# EAGLE board kolektorius_v2-1 (EAGLE 6.3)
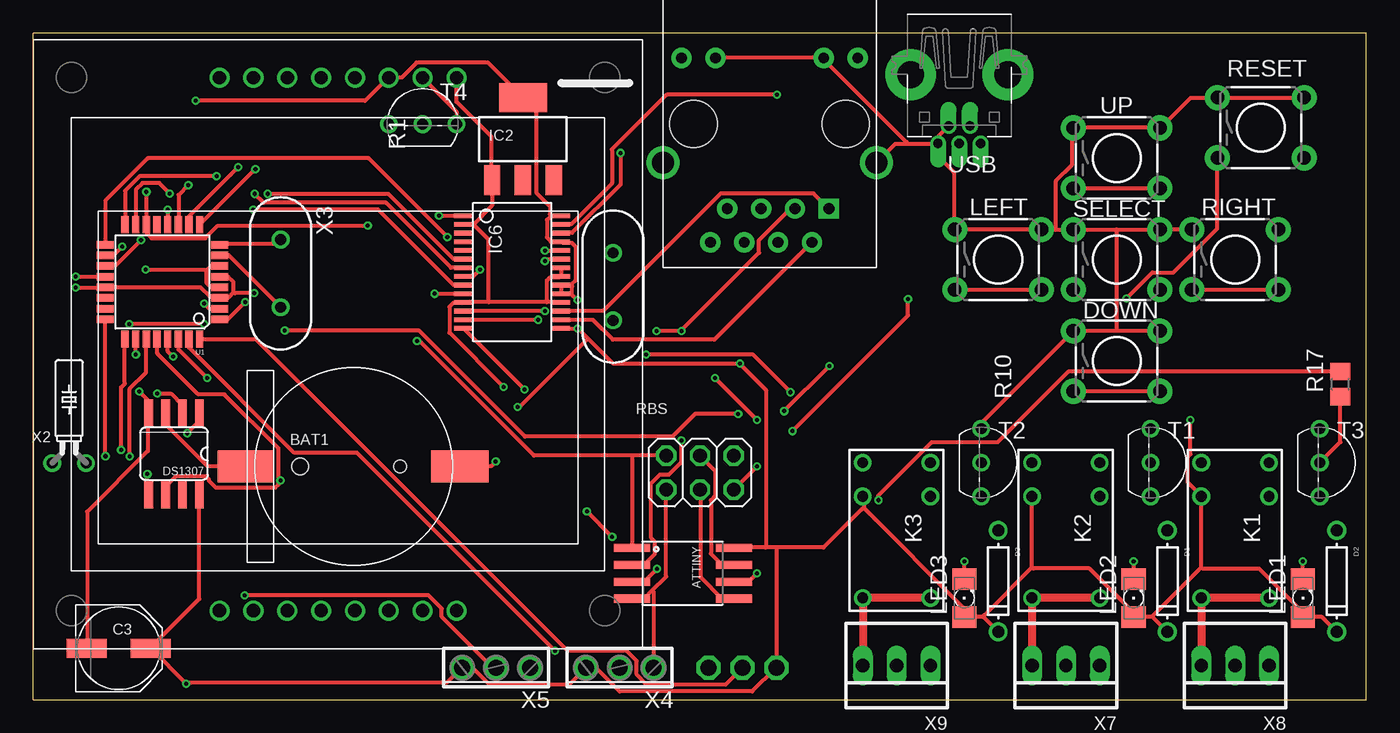
[diagram p0: board, top side]
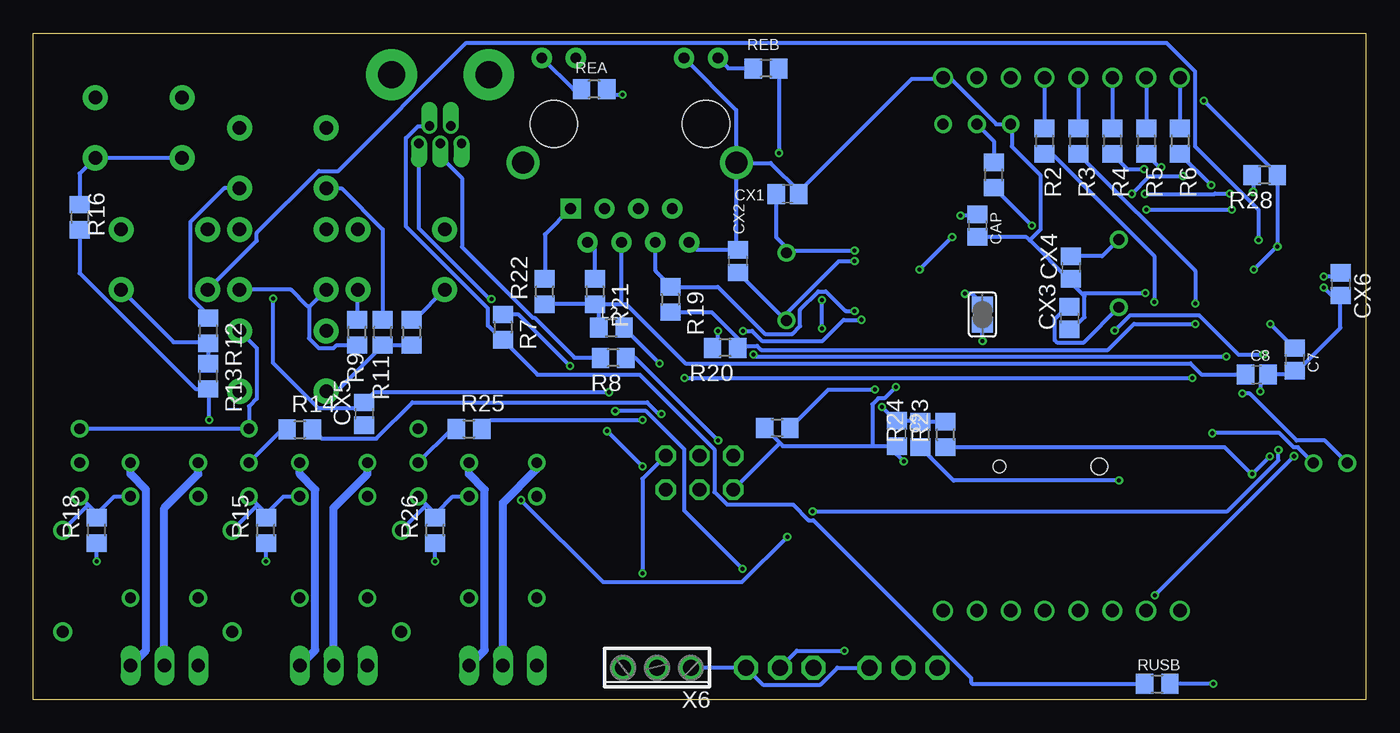
[diagram p1: board, bottom side, seen from below]

Size 100 x 50 mm. Coordinates in mm from the lower left corner, seen from the top.
Outline: 100,50 0,50 0,0 100,0 100,50
Copper layers (1*16): Top 0.035mm / dielectric 1.5mm / Bottom 0.035mm
Design rules "Fusion_eagle_rule_v1.1": minimum track width 6mil, minimum drill 12mil, track to track 6mil, track to pad 6mil, pad to pad 6mil, via to via 6mil, smd to smd 0mil, copper to edge 10mil, drill to drill 10mil, minimum pad ring 10mil, minimum via ring 6mil, stop-mask expansion 2mil, vias tented up to drill 100mil, thermal gap 10mil
Net classes: 0 default: width 0.305 mm, clearance 0.203 mm; 1 power: width 0.61 mm, clearance 0.203 mm
vRestrict: area 32,73 to 71,78

## Footprints (pad centres in the part's own frame; a part is rotated, then mirrored left to right if it is on the bottom)
SO8S2 = smd 0.61 x 2.7: 1 -1.905,-3.778; 2 -0.635,-3.778; 3 0.635,-3.778; 4 1.905,-3.778; 5 1.905,3.853; 6 0.635,3.853; 7 -0.635,3.853; 8 -1.905,3.853
BATTCON_12MM_SMT = smd 2.4 x 4.3: P$1 0,11.96 | smd 2.4 x 4.2: P$2 0,-4.1 | hole 0.95: 0,7.5 | hole 1.25: 0,0
PANASONIC_D = smd 3 x 1.4: + 2.4,0; - -2.4,0
C0805 = smd 1.3 x 1.5: 1 -0.85,0; 2 0.85,0
C0805' = smd 1.3 x 1.5: 1 -0.95,0; 2 0.95,0
DO-1N4148 = drill 0.9: A -3.81,0; C 3.81,0
TACTILE-PTH = drill 1.016 pad 1.88: 1 -3.251,2.261; 2 3.251,2.261; 3 -3.251,-2.261; 4 3.251,-2.261
SO08 = smd 0.66 x 2.032: 1 -1.905,-3.073; 2 -0.635,-3.073; 3 0.635,-3.073; 4 1.905,-3.073; 5 1.905,3.073; 6 0.635,3.073; 7 -0.635,3.073; 8 -1.905,3.073
SOT223 = smd 1.219 x 2.235: 1 -2.311,-3.099; 2 0,-3.099; 3 2.311,-3.099 | smd 3.6 x 2.2: 4 0,3.099
SSOP28DB = smd 0.348 x 1.397: 1 -4.225,-3.656; 2 -3.575,-3.656; 3 -2.925,-3.656; 4 -2.275,-3.656; 5 -1.625,-3.656; 6 -0.975,-3.656; 7 -0.325,-3.656; 8 0.325,-3.656; 9 0.975,-3.656; 10 1.625,-3.656; 11 2.275,-3.656; 12 2.925,-3.656; 13 3.575,-3.656; 14 4.225,-3.656; 15 4.225,3.656; 16 3.575,3.656; 17 2.925,3.656; 18 2.275,3.656; 19 1.625,3.656; 20 0.975,3.656; 21 0.325,3.656; 22 -0.325,3.656; 23 -0.975,3.656; 24 -1.625,3.656; 25 -2.275,3.656; 26 -2.925,3.656; 27 -3.575,3.656; 28 -4.225,3.656
2X03 = drill 1.016 octagon: 1 -2.54,-1.27; 2 -2.54,1.27; 3 0,-1.27; 4 0,1.27; 5 2.54,-1.27; 6 2.54,1.27
G5V1 = drill 0.813: 1 -5.08,-2.54; 2 -2.54,-2.54; 5 5.08,-2.54; 6 5.08,2.54; 9 -2.54,2.54; 10 -5.08,2.54
R0805 = smd 1.3 x 1.5: 1 -0.95,0; 2 0.95,0
1206 = smd 1.6 x 1.803: A -1.422,0; C 1.422,0
HR911105A = drill 0.813 pad 1.524: G+ 4.953,-6.604; G- 4.953,-4.064; GND -8.89,4.445; NC -6.35,3.175; P4 -8.89,-0.635; P5 -6.35,0.635; RD+ -6.35,-1.905; RD- -8.89,1.905; TD- -8.89,-3.175; Y+ 4.953,6.604; Y- 4.953,4.064 | drill 1.651 pad 2.159: SHIELD0 -2.921,8.001; SHIELD1 -2.921,-8.001 | drill 0.813 pad 1.524 square: TD+ -6.35,-4.445 | hole 3.556: 0,-5.715; 0,5.715
SJ = smd 1.168 x 1.6: 1 -0.762,0; 2 0.762,0
TO92-EBC-OVAL = drill 0.813: B 0,-1.27; C 2.54,-1.27; E -2.54,-1.27
TQFP32-08 = smd 1.27 x 0.559: 1 -4.293,2.8; 2 -4.293,2; 3 -4.293,1.2; 4 -4.293,0.4; 5 -4.293,-0.4; 6 -4.293,-1.2; 7 -4.293,-2; 8 -4.293,-2.8; 17 4.293,-2.8; 18 4.293,-2; 19 4.293,-1.2; 20 4.293,-0.4; 21 4.293,0.4; 22 4.293,1.2; 23 4.293,2; 24 4.293,2.8 | smd 0.559 x 1.27: 9 -2.8,-4.293; 10 -2,-4.293; 11 -1.2,-4.293; 12 -0.4,-4.293; 13 0.4,-4.293; 14 1.2,-4.293; 15 2,-4.293; 16 2.8,-4.293; 25 2.8,4.293; 26 2,4.293; 27 1.2,4.293; 28 0.4,4.293; 29 -0.4,4.293; 30 -1.2,4.293; 31 -2,4.293; 32 -2.8,4.293
CELLPHONE_NOKIA_5100_SPARKFUN = drill 1: P$1 -8.89,20; P$2 -6.35,20; P$3 -3.81,20; P$4 -1.27,20; P$5 1.27,20; P$6 3.81,20; P$7 6.35,20; P$8 8.89,20; P$9 -8.89,-20; P$10 -6.35,-20; P$11 -3.81,-20; P$12 -1.27,-20; P$13 1.27,-20; P$14 3.81,-20; P$15 6.35,-20; P$16 8.89,-20
USB-MINIB-THM-MOLEX = drill 0.7 offset: D+ 0,9.72; D- -0.8,8.42; GND 1.6,9.72; ID 0.8,8.42; VBUS -1.6,9.72 | drill 2 pad 3.81: GND1 -3.65,4.57; GND4 3.65,4.57
HC49US = drill 0.813: 1 -2.54,0; 2 2.54,0
TC26H = drill 0.813: 1 -1.27,0; 2 1.27,0
3POL254 = drill 1.2 octagon: 1 -2.54,0; 2 0,0; 3 2.54,0
22-23-2031 = drill 1 long: 1 -2.54,0; 2 0,0; 3 2.54,0

## Placement (x,y rotation side)
ATTINY  ATTINY45SO8S2  [SO8S2]  48.7,9.48 270 top
BAT1  [BATTCON_12MM_SMT]  20.03,17.48 270 top
C3  100u  [PANASONIC_D]  6.42,3.85 0 top
C7  0.1µ  [C0805]  5.36,25.53 90 bottom
C8  0.1µ  [C0805]  8.21,24.39 180 bottom
C9  0.1u  [C0805']  35.22,19.97 270 bottom
CAP  10u  [C0805]  29.16,35.57 270 bottom
CX1  18p  [C0805]  43.42,37.94 0 bottom
CX2  18p  [C0805]  47.13,32.9 90 bottom
CX3  22p  [C0805]  22.26,28.63 90 bottom
CX4  22p  [C0805]  22.14,32.42 90 bottom
CX5  100n  [C0805]  75.16,21.45 90 bottom
CX6  100n  [C0805]  1.91,31.17 270 bottom
D1  [DO-1N4148]  85.09,8.89 270 top
D2  [DO-1N4148]  97.79,8.89 270 top
D3  [DO-1N4148]  72.39,8.89 270 top
DOWN  [TACTILE-PTH]  81.28,25.4 0 top
DS1307  DS1307  [SO08]  10.56,18.45 180 top
IC2  LM1117-33  [SOT223]  36.73,42.07 0 top
IC6  ENC28J60  [SSOP28DB]  35.93,32.08 270 top
ISP  [2X03]  50.02,17.02 180 top
K1  G5V1  [G5V1]  90.17,12.7 270 top
K2  G5V1  [G5V1]  77.47,12.7 270 top
K3  G5V1  [G5V1]  64.77,12.7 270 top
L2  Bead  [R0805]  56.63,27.91 0 bottom
LED1  [1206]  95.25,7.62 90 top
LED2  [1206]  82.55,7.62 90 top
LED3  [1206]  69.85,7.62 90 top
LEFT  [TACTILE-PTH]  72.39,33.02 0 top
R1  10k  [R0805]  27.94,39.37 90 bottom
R2  10k  [R0805]  24.13,41.91 270 bottom
R3  10k  [R0805]  21.59,41.91 270 bottom
R4  10k  [R0805]  19.05,41.91 270 bottom
R5  10k  [R0805]  16.51,41.91 270 bottom
R6  10k  [R0805]  13.97,41.91 270 bottom
R7  47  [R0805]  64.77,27.94 270 bottom
R8  47  [R0805]  56.49,25.65 180 bottom
R9  3k3  [R0805]  75.69,27.56 90 bottom
R10  1k  [R0805]  71.63,27.56 270 bottom
R11  620  [R0805]  73.79,27.56 90 bottom
R12  330  [R0805]  86.87,27.69 270 bottom
R13  2k  [R0805]  86.87,24.26 270 bottom
R14  3k3  [R0805]  80.01,20.27 0 bottom
R15  470  [R0805]  82.55,12.7 90 bottom
R16  10k  [R0805]  96.52,36.2 270 bottom
R17  3k3  [R0805]  98.07,23.67 90 top
R18  470  [R0805]  95.25,12.7 90 bottom
R19  49  [R0805]  52.21,30.03 270 bottom
R20  49  [R0805]  48.09,26.4 180 bottom
R21  49  [R0805]  57.87,30.62 270 bottom
R22  49  [R0805]  61.63,30.62 90 bottom
R23  10k  [R0805]  31.56,19.89 90 bottom
R24  10k  [R0805]  33.43,19.89 90 bottom
R25  3k3  [R0805]  67.31,20.32 0 bottom
R26  470  [R0805]  69.85,12.7 90 bottom
R28  3k3  [R0805]  7.62,39.37 180 bottom
RBS  2.32K  [R0805]  44.18,20.4 0 bottom
REA  330  [R0805]  57.92,45.8 180 bottom
REB  330  [R0805]  45.03,47.36 180 bottom
RESET  [TACTILE-PTH]  92.09,42.91 0 top
RIGHT  [TACTILE-PTH]  90.17,33.02 0 top
RJ45  HR911105A  [HR911105A]  55.24,43.2 90 top
RUSB  1.5k  [R0805]  15.68,1.17 0 bottom
SELECT  [TACTILE-PTH]  81.28,33.02 0 top
SJ1  [SJ]  28.79,28.89 90 bottom
T1  2N2222  [TO92-EBC-OVAL]  85.09,17.78 270 top
T2  2N2222  [TO92-EBC-OVAL]  72.39,17.78 270 top
T3  2N2222  [TO92-EBC-OVAL]  97.79,17.78 270 top
T4  2N2222  [TO92-EBC-OVAL]  29.21,44.45 0 top
U1  ATMEGA328P  [TQFP32-08]  9.68,31.34 180 top
U$2  CELLPHONE_NOKIA_5100  [CELLPHONE_NOKIA_5100_SPARKFUN]  22.86,26.67 0 top
UP  [TACTILE-PTH]  81.28,40.64 0 top
USB  [USB-MINIB-THM-MOLEX]  69.47,51.46 180 top
X1  25MHz  [HC49US]  43.49,30.99 90 top
X2  32.768kHz  [TC26H]  2.69,17.75 0 top
X3  25MHz  [HC49US]  18.56,31.98 270 top
X4  [3POL254]  43.99,2.39 180 top
X5  [3POL254]  34.72,2.39 180 top
X6  [3POL254]  53.21,2.39 180 bottom
X7  22-23-2031  [22-23-2031]  77.47,2.54 180 top
X8  22-23-2031  [22-23-2031]  90.17,2.54 180 top
X9  22-23-2031  [22-23-2031]  64.77,2.54 180 top

## Library data of the parts
ATTINY IC2 X1 X3 = SparkFun
BAT1 = SparkFunNew
C3 C7 C8 CAP CX1-CX6 = resistor
C9 L2 R1-R26 R28 RBS REA REB RUSB = rcl
D1-D3 DS1307 LED1-LED3 T1-T4 USB = adafruit
DOWN LEFT RESET RIGHT SELECT UP = SparkFun-Electromechanical
IC6 = SparkFun-DigitalIC
ISP = pinhead
K1-K3 = relay; MPN: G5V-1-DC24; OC_FARNELL: 9949593; OC_NEWARK: 36M6377
RJ45 = CONNECTER
SJ1 = jumper
U1 = SparkFun-DigitalIC; PROD_ID: IC-09069
U$2 = DIY-Cellphone
X2 = crystal; OC_FARNELL: unknown; OC_NEWARK: unknown
X4-X6 = con-phoenix-254; OC_FARNELL: unknown; OC_NEWARK: unknown
X7-X9 = con-molex; MF: MOLEX; MPN: 22-23-2031; OC_FARNELL: 1462950; OC_NEWARK: 30C0862

## Nets
A0: U1.23
A1: U1.24 X5.2
A2: R17.2 U1.25
A3: R14.2 U1.26
A6: R12.2 R13.1 RIGHT.3 RIGHT.4 U1.19
A7: U1.22
D0: R25.2 U1.30
D1: U1.31 X4.2
D2: U1.32 X6.2
D3: R2.2 U1.1
D4: R3.2 U1.2
D5: R4.2 U1.9
D6: R5.2 U1.10
D7: R6.2 U1.11
D8: IC6.9 U1.12
D9: U1.13
D10: R1.1 R28.2 U1.14
D11: IC6.7 U1.15
D12: IC6.6 U1.16
D13: IC6.8 U1.17
D+: ATTINY.2 R8.1
D-: ATTINY.3 R7.1
DTR: CX5.1
GND: ATTINY.4 BAT1.P$1 C3.- C7.1 C8.1 C9.2 CAP.2 CX1.2 CX2.2 CX3.1 CX4.1 CX6.2 DOWN.1 DOWN.2 DS1307.4 IC2.1 IC6.2 IC6.11 IC6.18 IC6.21 IC6.22 ISP.6 LEFT.1 LEFT.2 RBS.1 RESET.1 RESET.2 RIGHT.1 RJ45.G- RJ45.GND RJ45.SHIELD0 RJ45.SHIELD1 RJ45.Y- SELECT.1 SELECT.2 T1.E T2.E T3.E T4.E U1.3 U1.5 U1.21 U$2.P$8 UP.1 UP.2 USB.GND USB.ID X4.1 X5.1 X6.1
LEDA: REA.2 RJ45.G+
LEDB: REB.2 RJ45.Y+
MISO: ATTINY.6 ISP.1
MOSI: ATTINY.5 ISP.4
N$1: LEFT.3 LEFT.4 R9.2 R10.1
N$2: D1.A K2.9 R15.2 T1.C
N$3: R14.1 T1.B
N$4 [power]: K2.5 K2.6 X7.3
N$5 [power]: K2.1 X7.2
N$6: DOWN.3 DOWN.4 R10.2 R11.1
N$7: LED2.C R15.1
N$8: DS1307.1 X2.2
N$9: R11.2 R12.1 UP.3 UP.4
N$11: D3.A K3.9 R26.2 T2.C
N$12: D2.A K1.9 R18.2 T3.C
N$13: R17.1 T3.B
N$14 [power]: K2.10 X7.1
N$15 [power]: K3.10 X9.1
N$16 [power]: K1.10 X8.1
N$17: R25.1 T2.B
N$18: R9.1 SELECT.3 SELECT.4
N$19 [power]: K1.5 K1.6 X8.3
N$20 [power]: K1.1 X8.2
N$21: LED1.C R18.1
N$22: R2.1 U$2.P$5
N$23: R5.1 U$2.P$2
N$24: R4.1 U$2.P$3
N$25: R3.1 U$2.P$4
N$26: T4.C U$2.P$7
N$28 [power]: K3.5 K3.6 X9.3
N$29 [power]: K3.1 X9.2
N$30: DS1307.2 X2.1
N$31: LED3.C R26.1
N$32: CX4.2 U1.8 X3.1
N$33: CX3.2 U1.7 X3.2
N$34: IC6.27 REA.1
N$35: CX6.1 U1.20
N$36: BAT1.P$2 DS1307.3
N$37: IC6.26 REB.1
N$38: R8.2 USB.D+
N$39: CAP.1 IC6.1
N$41: CX1.1 IC6.24 X1.2
N$42: CX2.1 IC6.23 X1.1
N$44: R1.2 T4.B
N$45: R7.2 RUSB.1 USB.D-
N$46: CX5.2 R16.1 RESET.3 RESET.4 U1.29
N$52: ATTINY.1 ISP.5 SJ1.1
N$54: C7.2 R19.2 R20.1
N$59: IC6.14 RBS.2
RD+: IC6.13 R20.2 RJ45.RD+
RD-: IC6.12 R19.1 RJ45.RD-
RESET: IC6.10 SJ1.2
SCK: ATTINY.7 ISP.3
SCL: DS1307.6 R24.1 U1.28
SDA: DS1307.5 R23.1 U1.27
TCT: C8.2 L2.1 R21.2 R22.1 RJ45.P4
TD+: IC6.17 R22.2 RJ45.TD+
TD-: IC6.16 R21.1 RJ45.TD-
V$: R6.1 U$2.P$1
VCC: ATTINY.8 C3.+ C9.1 D1.C D2.C D3.C DS1307.8 IC2.4 IC6.15 IC6.19 IC6.20 IC6.25 IC6.28 K1.2 K2.2 K3.2 L2.2 LED1.A LED2.A LED3.A R13.2 R16.2 R23.2 R24.2 R28.1 RUSB.2 U1.4 U1.6 U1.18 U$2.P$6 X4.3 X5.3 X6.3
VIN: ISP.2 USB.VBUS

## Tracks (layer width: path | path; a pad name or v marks a point on that pad's centre or on a via)
A1  (via drill 0.3)
  Top 0.305: v5.41,18.26 5.41,28.52 U1.24 | v15.85,7.82 29.64,7.82 30.63,6.83 30.63,6.2 34.44,2.39 X5.2
  Bottom 0.305: v15.85,7.82 v5.41,18.26
A2  (via drill 0.3)
  Top 0.305: v6.58,18.75 6.58,23.42 6.86,23.7 6.86,27.03 U1.25 | v43.43,12.22 v41.53,14.12 | v63.4,14.96 63.4,15.32 67.39,19.3 72.34,19.3 77.65,24.61 R17.2
  Bottom 0.305: v6.58,18.75 6.58,17.96 10.41,14.12 v41.53,14.12 | v43.43,12.22 46.84,8.81 57.25,8.81 v63.4,14.96
A3  (via drill 0.3)
  Top 0.305: v7.7,25.88 7.7,27.03 U1.26 | v18.87,27.69 28.93,27.69 36.88,19.74 47.95,19.74 49.66,21.44 v52.88,21.44
  Bottom 0.305: v7.7,25.88 9.58,25.88 12.55,28.85 17.7,28.85 v18.87,27.69 | v52.88,21.44 53.09,21.44 53.95,22.3 71.55,22.3 74.27,19.58 78.36,19.58 79.05,20.27 R14.2
A6  (via drill 0.3)
  Top 0.305: v8.08,34.47 6.17,32.56 5.41,32.56 U1.19 | RIGHT.3 RIGHT.4
  Bottom 0.305: R13.1 R12.2 87,26.82 89.48,26.82 RIGHT.4 | v8.08,34.47 8.08,36.75 12.85,41.53 12.85,47.14 14.99,49.28 67.51,49.28 77.11,39.67 78.59,39.67 83.24,35.03 83.24,34.44 RIGHT.3
D0  (via drill 0.3)
  Top 0.305: v13.03,24.13 10.9,26.26 10.9,27.03 U1.30 | v54.3,20.98 v51.16,24.13
  Bottom 0.305: v51.16,24.13 v13.03,24.13 | v54.3,20.98 65.68,20.98 66.34,20.32 R25.2
D1  (via drill 0.3)
  Top 0.305: v39.14,3.66 24.28,18.52 19.58,18.52 11.68,26.42 11.68,27.03 U1.31
  Bottom 0.305: v39.14,3.66 42.72,3.66 X4.2
D2
  Top 0.305: X6.2 51.94,1.12 46.02,1.12 45.26,1.88 45.26,2.9 44.5,3.66 40.08,3.66 16.71,27.03 12.5,27.03 U1.32
D3  (via drill 0.3)
  Top 0.305: v15.9,29.84 14.61,28.55 13.99,28.55 U1.1
  Bottom 0.305: v15.9,29.84 15.9,33.3 23.55,40.95 24.13,40.95 R2.2
D4  (via drill 0.3)
  Top 0.305: v12.83,29.72 13.18,29.36 13.97,29.36 U1.2
  Bottom 0.305: v12.83,29.72 12.83,32.18 21.59,40.95 R3.2
D5  (via drill 0.3)
  Top 0.305: v16.66,39.8 12.5,35.64 U1.9
  Bottom 0.305: v16.66,39.8 17.91,39.8 19.05,40.95 R4.2
D6  (via drill 0.3)
  Top 0.305: v15.37,39.95 11.68,36.27 U1.10
  Bottom 0.305: v15.37,39.95 15.52,39.95 16.51,40.95 R5.2
D7  (via drill 0.3)
  Top 0.305: v11.63,38.61 10.9,37.87 10.9,35.64 U1.11
  Bottom 0.305: v11.63,38.61 13.97,40.95 R6.2
D8  (via drill 0.3)
  Top 0.305: v10.08,36.78 U1.12 | v16.48,36.78 25.86,36.78 31.52,31.11 32.26,31.11 IC6.9
  Bottom 0.305: v16.48,36.78 v10.08,36.78
D10  (via drill 0.3)
  Top 0.305: v8.48,38.1 U1.14 8.53,35.48 8.53,34.95 8.87,34.62 12.9,34.62 13.84,35.56 v25.09,35.56
  Bottom 0.305: v8.48,38.1 8.48,39.29 R28.2 | v25.09,35.56 27.94,38.41 R1.1
D11  (via drill 0.3)
  Top 0.305: v10.24,37.97 9.45,38.76 8.2,38.76 7.7,38.25 7.7,35.64 U1.15 | v16.61,37.95 17.27,37.29 26.47,37.29 31.34,32.41 32.26,32.41 IC6.7
  Bottom 0.305: v10.24,37.97 11.33,37.97 11.35,37.95 v16.61,37.95
D12  (via drill 0.3)
  Top 0.305: v13.74,39.27 7.98,39.27 6.88,38.18 U1.16 | v17.58,37.95 26.64,37.95 31.52,33.07 32.26,33.07 IC6.6
  Bottom 0.305: v13.74,39.27 16.26,39.27 v17.58,37.95
D13  (via drill 0.3)
  Top 0.305: v31.06,34.7 25.15,40.62 8.59,40.62 5.41,37.44 5.41,34.16 U1.17 | v33.5,32.26 33.02,31.77 32.28,31.77 IC6.8
  Bottom 0.305: v33.5,32.26 v31.06,34.7
D+  (via drill 0.3)
  Top 0.305: v48.62,19.43 48.62,17.83 47.68,16.89 47.02,16.89 46.35,16.23 46.35,12.12 46.63,11.84 46.63,10.92 45.85,10.13 44.93,10.13 ATTINY.2
  Bottom 0.305: v48.62,19.43 54.81,25.63 55.52,25.63 R8.1
D-  (via drill 0.3)
  Top 0.305: v56.34,21.64 v59.74,25.04 | v46.79,9.8 45.85,8.87 44.93,8.87 ATTINY.3
  Bottom 0.305: v59.74,25.04 63.58,28.88 R7.1 | v56.34,21.64 54.03,21.64 51.16,18.77 51.16,14.17 v46.79,9.8
GND  (via drill 0.3)
  Top 0.305: RESET.2 95.33,45.19 88.98,45.19 RESET.1 88.82,45.16 86.84,45.16 84.66,42.98 UP.2 UP.1 77.95,42.77 77.95,40.16 76.73,38.94 76.73,35.28 | RIGHT.1 SELECT.2 81.28,35.28 | 76.73,35.28 LEFT.2 LEFT.1 69.06,35.41 69.06,39.57 67.94,40.69 67.94,41.6 USB.GND | 76.73,35.28 SELECT.1 81.28,35.28 | T2.E 71.12,20.75 DOWN.1 81.28,27.66 | DOWN.2 81.28,27.66 | 81.28,27.66 81.28,35.28 | 14.99,30.53 14.61,30.15 13.99,30.15 U1.3 13.84,30.23 13.26,30.23 12.55,30.94 5.41,30.94 U1.21 5.23,30.91 v3.17,30.91 | 14.99,30.53 14.99,31.37 14.63,31.73 13.99,31.73 U1.5 | v7.95,23.11 8.64,22.43 8.64,21.54 DS1307.4 8.59,21.39 8.59,18.64 4.04,14.1 4.04,3.86 C3.- | v34.7,17.86 34.34,17.5 32,17.5 BAT1.P$1 | 46.43,8.18 45.92,7.67 45.06,7.67 ATTINY.4 | 46.43,8.18 47.47,9.22 ISP.6 | 33.02,35.66 32.28,35.66 IC6.2 | 33.02,35.66 34.42,37.06 IC2.1 34.37,39.12 34.37,42.24 31.75,44.86 U$2.P$8 | IC6.22 39.6,32.38 39.6,31.77 IC6.21 39.45,31.7 38.79,31.7 38.53,31.45 38.53,29.82 | 38.53,29.82 39.57,29.82 IC6.18 | 38.53,29.82 34.16,29.82 | 34.16,29.82 32.28,29.82 IC6.11 32.13,29.77 31.5,29.77 31.22,29.49 31.22,27.53 v35.28,23.47 | 33.02,35.66 34.16,34.52 34.16,29.82 | RJ45.Y- 59.28,48.16 RJ45.G- 59.33,48.01 65.51,41.83 65.51,41.71 | USB.GND 67.89,41.76 67.89,42.27 68.66,43.03 USB.ID | 65.51,41.71 64.67,41.71 RJ45.SHIELD1 | 65.51,41.71 67.72,41.71 USB.GND | v16.56,30.5 15.11,30.5 14.99,30.53 | X4.1 46.53,8.08 46.43,8.18
  Bottom 0.305: DOWN.2 83.24,26.36 83.24,22.58 83.82,22 T1.E T3.E | v7.95,23.11 7.95,23.75 7.44,24.26 C8.1 7.34,24.41 5.64,24.41 5.38,24.66 C7.1 5.23,24.59 1.93,27.89 1.93,30.3 CX6.2 2.06,29.79 v3.17,30.91 | 37.06,19.02 43.76,19.02 43.99,19.25 | 37.06,19.02 C9.2 35.74,18.9 v34.7,17.86 | 43.99,19.25 RBS.1 | 43.99,19.25 47.47,15.77 ISP.6 | 21.26,30.4 21.13,30.28 21.13,28.7 22.05,27.79 CX3.1 | 21.26,30.4 22.12,31.27 22.12,31.55 CX4.1 22.25,31.47 25.25,34.47 | 25.25,34.47 25.48,34.7 29.16,34.7 CAP.2 | 25.25,34.47 24.43,35.28 24.43,39.34 26.59,41.5 26.59,43.05 T4.E 27.76,43.18 31.24,46.66 U$2.P$8 31.88,46.58 34.09,46.58 42.44,38.23 CX1.2 42.57,38.15 44.68,40.26 47.22,40.26 RJ45.SHIELD0 | RJ45.GND 50.77,34.29 50.24,33.76 47.14,33.76 CX2.2 47.27,33.88 47.27,40.11 RJ45.SHIELD0 | RJ45.SHIELD0 47.27,40.44 47.27,44.25 51.16,48.13 RJ45.Y- | 37.06,19.02 37.06,22.15 36.6,22.61 36.14,22.61 v35.28,23.47 | v16.56,30.5 21.16,30.5 21.26,30.4 | X5.1 39.67,2.39 40.95,1.12 45.26,1.12 X4.1 X6.1
LEDA
  Bottom 0.305: REA.2 59.49,45.8 61.82,48.13 RJ45.G+
LEDB
  Bottom 0.305: REB.2 46,47.37 47.85,47.37 48.62,48.13 RJ45.Y+
MISO  (via drill 0.3)
  Top 0.305: v54.3,9.47 53.7,8.87 52.58,8.87 ATTINY.6
  Bottom 0.305: v54.3,9.47 54.3,16.56 52.58,18.29 ISP.1
MOSI
  Top 0.305: ATTINY.5 52.55,7.59 51.64,7.59 50.04,9.2 50.04,15.75 ISP.4
N$1
  Top 0.305: LEFT.3 LEFT.4
  Bottom 0.305: R9.2 75.69,30.71 LEFT.4 | LEFT.3 71.37,28.52 71.63,28.52 R10.1
N$2
  Bottom 0.305: T1.C 83.19,14.61 | 83.19,14.61 82.55,13.97 R15.2 82.42,14.05 81.23,15.24 K2.9 | 83.19,14.61 D1.A
N$3
  Bottom 0.305: R14.1 81.33,20.27 T1.B
N$4
  Top 0.61: K2.6 K2.5 X7.3
N$5
  Bottom 0.61: K2.1 74.93,16.92 77.47,14.38 X7.2
N$6
  Top 0.305: DOWN.3 DOWN.4
  Bottom 0.305: R10.2 R11.1 73.86,26.49 77.22,23.14 DOWN.3
N$7  (via drill 0.3)
  Top 0.305: LED2.C v82.55,10.36
  Bottom 0.305: v82.55,10.36 R15.1
N$8  (via drill 0.3)
  Top 0.305: v11.53,19.99 12.45,20.9 12.45,21.51 DS1307.1
  Bottom 0.305: v11.53,19.99 6.5,19.99 5.44,18.92 5.13,18.92 X2.2
N$9
  Top 0.305: UP.3 UP.4
  Bottom 0.305: R12.1 86.87,28.85 88.21,30.2 88.21,35.84 85.67,38.38 UP.4 | R11.2 73.79,35.28 76.89,38.38 UP.3
N$11
  Bottom 0.305: T2.C 70.48,14.61 | 70.48,14.61 69.85,13.97 R26.2 69.72,14.05 68.53,15.24 K3.9 | 70.48,14.61 D3.A
N$12
  Bottom 0.305: T3.C 95.89,14.61 | 95.89,14.61 95.25,13.97 R18.2 95.12,14.05 93.93,15.24 K1.9 | 95.89,14.61 D2.A
N$13
  Top 0.305: R17.1 98.07,19.33 T3.B
N$14
  Bottom 0.61: K2.10 80.01,16.92 78.84,15.75 78.84,3.71 X7.1
N$15
  Bottom 0.61: K3.10 67.31,16.92 66.14,15.75 66.14,3.71 X9.1
N$16
  Bottom 0.61: K1.10 92.71,16.92 91.54,15.75 91.54,3.71 X8.1
N$17
  Bottom 0.305: R25.1 68.58,20.32 T2.B
N$18
  Bottom 0.305: 79.32,29.46 79.32,27.1 78.59,26.36 77.47,26.36 77.24,26.59 75.69,26.59 R9.1 | SELECT.3 79.32,29.46 | SELECT.4 80.67,30.76 79.45,29.54 79.32,29.46
N$19
  Top 0.61: K1.6 K1.5 X8.3
N$20
  Bottom 0.61: K1.1 87.63,16.92 90.17,14.38 X8.2
N$21  (via drill 0.3)
  Top 0.305: LED1.C v95.25,10.36
  Bottom 0.305: v95.25,10.36 R18.1
N$22
  Bottom 0.305: U$2.P$5 R2.1
N$23
  Bottom 0.305: U$2.P$2 R5.1
N$24
  Bottom 0.305: U$2.P$3 R4.1
N$25
  Bottom 0.305: U$2.P$4 R3.1
N$26
  Top 0.305: T4.C 31.75,44.12 U$2.P$7
N$28
  Top 0.61: K3.6 K3.5 X9.3
N$29
  Bottom 0.61: K3.1 62.23,17.3 64.77,14.76 X9.2
N$30  (via drill 0.3)
  Top 0.305: v9.3,22.96 10.34,22.96 11.18,22.12 11.18,21.54 DS1307.2
  Bottom 0.305: v9.3,22.96 8.74,22.96 5.21,19.43 3.1,19.43 X2.1
N$31  (via drill 0.3)
  Top 0.305: LED3.C v69.85,10.36
  Bottom 0.305: v69.85,10.36 R26.1
N$32
  Top 0.305: U1.8 13.99,34.16 18.19,34.16 18.54,34.52 X3.1
  Bottom 0.305: CX4.2 22.12,33.27 19.81,33.27 X3.1
N$33
  Top 0.305: U1.7 13.99,33.33 14.68,33.33 18.54,29.46 X3.2
  Bottom 0.305: CX3.2 22.28,29.46 22.48,29.46 23.37,28.57 23.37,26.98 23.16,26.77 21.23,26.77 X3.2
N$34  (via drill 0.3)
  Top 0.305: v55.8,45.39 47.5,45.39 43.41,41.3 43.41,38.73 40.34,35.66 IC6.27
  Bottom 0.305: v55.8,45.39 56.57,45.39 56.95,45.77 REA.1
N$35  (via drill 0.3)
  Top 0.305: v3.17,31.75 U1.20
  Bottom 0.305: v3.17,31.75 2.18,31.75 1.93,32 CX6.1
N$36
  Top 0.305: DS1307.3 9.93,20.65 13.08,17.5 15.93,17.5 BAT1.P$2
N$37  (via drill 0.3)
  Top 0.305: v44.07,41.02 44.07,38.66 40.44,35.03 39.6,35.03 IC6.26
  Bottom 0.305: v44.07,41.02 44.07,47.35 REB.1
N$38
  Bottom 0.305: R8.2 57.45,25.65 59.41,25.65 62.41,28.65 62.53,28.65 67.84,33.96 67.84,39.14 69.47,40.77 USB.D+
N$39  (via drill 0.3)
  Top 0.305: v30.43,36.32 32.26,36.32 IC6.1
  Bottom 0.305: v30.43,36.32 29.26,36.32 29.18,36.4 CAP.1
N$41  (via drill 0.3)
  Top 0.305: v38.38,33.71 39.57,33.71 IC6.24
  Bottom 0.305: v38.38,33.71 43.33,33.71 43.48,33.55 X1.2 43.41,33.83 44.25,34.67 44.25,37.92 CX1.1
N$42  (via drill 0.3)
  Top 0.305: v38.38,32.89 38.53,33.05 39.57,33.05 IC6.23
  Bottom 0.305: v38.38,32.89 39.57,32.89 43.48,28.98 43.48,28.47 X1.1 43.61,28.52 47.12,32.03 CX2.1
N$44
  Bottom 0.305: R1.2 27.94,41.91 T4.B
N$45
  Bottom 0.305: RUSB.1 16.64,1.19 29.57,1.19 29.64,1.32 29.64,1.63 41.48,13.46 41.83,13.46 43,14.63 47.95,14.63 48.9,15.57 48.9,18.77 54.51,24.38 62.18,24.38 64.77,26.98 R7.2 64.9,27.08 65.89,28.07 65.89,29.36 72.03,35.51 72.03,42.14 71.14,43.03 70.28,43.03 USB.D-
N$46  (via drill 0.3)
  Top 0.305: v10.49,25.73 10.08,26.14 10.08,27.03 U1.29 | v45.97,25.88 54,25.88 v56.82,23.06 | v82.02,30.1 83.97,32.05 85.55,32.05 88.82,35.33 88.82,40.64 RESET.3
  Bottom 0.305: R16.1 96.52,39.47 95.35,40.64 RESET.4 95.2,40.66 88.85,40.66 RESET.3 | v10.49,25.73 45.82,25.73 v45.97,25.88 | v56.82,23.06 74.4,23.06 CX5.2 75.31,22.25 75.72,21.84 78.59,21.84 82.02,25.27 v82.02,30.1
N$52  (via drill 0.3)
  Top 0.305: v28.78,26.9 28.98,26.9 37.57,18.31 44.93,18.31 | 44.93,18.31 47.47,18.31 ISP.5 | 44.93,18.31 44.93,11.4 ATTINY.1
  Bottom 0.305: v28.78,26.9 28.78,28.12 SJ1.1
N$54  (via drill 0.3)
  Top 0.305: v12.83,28.19 v7.19,28.19
  Bottom 0.305: v7.19,28.19 5.38,26.39 C7.2 | v12.83,28.19 17.42,28.19 19.38,26.24 45.39,26.24 45.7,26.54 46.99,26.54 47.12,26.42 R20.1 46.71,26.67 49.1,29.06 52.2,29.06 R19.2
N$59  (via drill 0.3)
  Top 0.305: v36.85,23.27 32.28,27.84 IC6.14
  Bottom 0.305: v36.85,23.27 40.36,23.27 43.2,20.42 RBS.2
RD+  (via drill 0.3)
  Top 0.305: v37.87,28.5 32.28,28.5 IC6.13 | v46.76,27.66 v48.64,27.66 48.72,27.79 54.46,33.53 54.46,34.49 56.79,36.83 57.12,36.83 RJ45.RD+
  Bottom 0.305: v37.87,28.5 39.22,28.5 40.79,26.92 45.34,26.92 46.08,27.66 v46.76,27.66 | v48.64,27.66 48.64,26.8 49.02,26.42 R20.2
RD-  (via drill 0.3)
  Top 0.305: v38.38,29.16 32.28,29.16 IC6.12
  Bottom 0.305: v38.38,29.16 39.06,29.16 40.54,30.63 41.1,30.63 42.47,29.26 42.47,28.02 43.05,27.43 45.11,27.43 48.64,30.96 52.2,30.96 R19.1 52.27,31.11 53.31,32.16 53.31,34.29 RJ45.RD-
RESET  (via drill 0.3)
  Top 0.305: v30.1,30.45 32.26,30.45 IC6.10
  Bottom 0.305: v30.1,30.45 29.59,30.45 28.8,29.67 SJ1.2
SCK
  Top 0.305: ATTINY.7 52.55,10.13 51.64,10.13 50.83,10.95 50.83,14.96 51.16,15.29 51.16,17.17 50.04,18.29 ISP.3
SCL  (via drill 0.3)
  Top 0.305: 18.39,16.43 18.39,16.13 18.16,15.9 13.69,15.9 13.16,16.43 13.16,16.54 12.93,16.76 10.72,16.76 9.93,15.98 9.93,15.39 DS1307.6 | 18.39,16.43 18.39,18.85 14.33,22.91 12.37,22.91 9.3,25.98 9.3,27.03 U1.28 | v18.54,16.43 18.39,16.43
  Bottom 0.305: v18.54,16.43 30.96,16.43 32.69,18.16 32.69,18.19 33.43,18.92 R24.1
SDA  (via drill 0.3)
  Top 0.305: v7.24,18.24 7.24,23.34 8.46,24.56 8.46,27.03 U1.27 | v8.56,16.92 8.56,15.47 8.64,15.39 DS1307.5
  Bottom 0.305: v7.24,18.24 v8.56,16.92 8.69,16.99 10.62,18.92 31.55,18.92 R23.1
TCT
  Bottom 0.305: 55.88,29.67 R21.2 | 55.88,29.67 55.52,29.67 51.08,25.22 13.18,25.22 12.37,24.41 9.07,24.41 C8.2 | L2.1 57.58,29.54 R21.2 | R22.1 58.01,29.67 R21.2 | 55.88,29.67 55.88,34.29 RJ45.P4
TD+
  Top 0.305: IC6.17 42.75,29.16 51.56,37.97 58.55,37.97 59.66,36.85 RJ45.TD+
  Bottom 0.305: R22.2 61.62,34.9 59.69,36.83 RJ45.TD+
TD-
  Top 0.305: IC6.16 41.99,28.5 43.48,27 51.1,27 58.4,34.29 RJ45.TD-
  Bottom 0.305: R21.1 57.89,31.57 57.89,33.78 58.4,34.29 RJ45.TD-
V$
  Bottom 0.305: U$2.P$1 R6.1
VCC  (via drill 0.3)
  Top 0.305: 71.27,6.2 LED3.A | D3.C 71.27,6.2 | LED3.A | 74.93,9.91 K2.2 | 74.93,9.91 71.35,6.33 71.27,6.2 | LED1.A 96.67,6.2 D2.C | LED1.A | 83.97,6.2 LED2.A | D1.C 83.97,6.2 | LED2.A | 87.63,9.91 K1.2 87.55,15.37 86.61,16.31 86.61,18.21 86.82,18.41 v86.82,20.98 | 87.63,9.91 84.05,6.33 83.97,6.2 | LED1.A 95.2,6.35 95.2,6.58 91.95,9.83 87.76,9.83 87.63,9.91 | 74.93,9.91 75.06,9.83 79.25,9.83 82.75,6.33 LED2.A | 12.98,32.18 12.98,31.29 13.31,30.96 13.97,30.96 U1.4 | 12.98,32.18 13.34,32.54 U1.6 | v6.66,33.98 6.02,33.35 5.41,33.35 U1.18 | v8.43,32.26 12.85,32.26 12.98,32.18 | IC6.19 39.6,30.48 IC6.20 39.75,31.14 40.36,31.14 | 38.84,36.3 38.53,35.99 38.53,34.67 38.84,34.37 39.57,34.37 IC6.25 39.73,34.29 40.39,34.29 40.66,34.01 40.66,31.45 40.36,31.14 | 38.84,36.3 39.57,36.3 IC6.28 | 38.84,36.3 38.76,36.42 38.76,37.01 37.72,38.05 37.72,44.12 36.8,45.03 IC2.4 36.73,45.19 34.11,47.8 28.75,47.8 27.64,46.69 26.67,46.69 U$2.P$6 26.54,46.58 24.89,44.93 v12.19,44.93 | v40.82,29.97 40.44,30.35 40.44,31.01 40.36,31.14 | IC6.15 39.73,27.84 v40.82,27.84 40.95,27.76 41.63,27.08 | 62.31,14.38 69.8,6.88 69.8,6.35 LED3.A | 62.31,14.38 62.31,15.11 K3.2 | 55.75,11.4 59.28,11.4 62.18,14.3 62.31,14.38 | 55.75,11.4 54.97,11.4 | 54.97,11.4 52.58,11.4 ATTINY.8 | 55.75,11.4 X6.3 55.63,2.31 53.92,0.61 43.99,0.61 42.29,2.31 41.58,2.31 X4.3 40.18,1.12 34.21,1.12 32.94,2.39 X5.3 32.05,2.31 31.01,1.27 11.61,1.27 v11.48,1.19 8.84,3.83 C3.+ 8.89,3.99 12.45,7.54 12.45,15.37 DS1307.8 | 41.63,27.08 43.48,25.22 v53.01,25.22 53.09,25.09 54.97,23.22 54.97,11.4 | v36.32,21.95 36.5,21.95 41.63,27.08
  Bottom 0.305: R16.2 96.52,32 87.83,23.32 R13.2 86.82,23.16 v86.82,20.98 | v8.43,32.26 6.78,33.91 v6.66,33.98 6.66,39.37 R28.1 6.76,39.5 v12.19,44.93 | R23.2 31.57,20.85 33.43,20.85 R24.2 33.55,20.93 35.08,20.93 C9.1 35.36,20.98 v36.32,21.95 | v40.82,27.84 v40.82,29.97 | v53.01,25.22 55.68,27.89 L2.2 | v11.48,1.19 14.71,1.19 RUSB.2
VIN  (via drill 0.3)
  Top 0.305: v65.63,30.05 65.63,28.83 v56.95,20.14 | v54.3,17.5 52.58,15.77 ISP.2
  Bottom 0.305: v65.63,30.05 65.76,30.05 71.07,35.36 USB.VBUS | v54.3,17.5 v56.95,20.14

## Text on the board
tNames: Saules kolektoriaus valdiklis v2.0 | www.SauleVire.lt | (2014.02)
BoxDim: Serpac WM-032C Enclosure | All units are in inch | Left | Right | Front | Bottom